# Altium PCB Power.PcbDoc
Units mm, origin at the board's own origin, x right, y up, seen from the top; angles counter-clockwise.
Board outline 47 x 53 mm, 4 copper layers (Top Copper Layer, Internal Copper Layer 1, Internal Copper Layer 2, Bottom Copper Layer), stack 1.58 mm thick; 21 components, 15 nets, 71 pads, 9 vias.
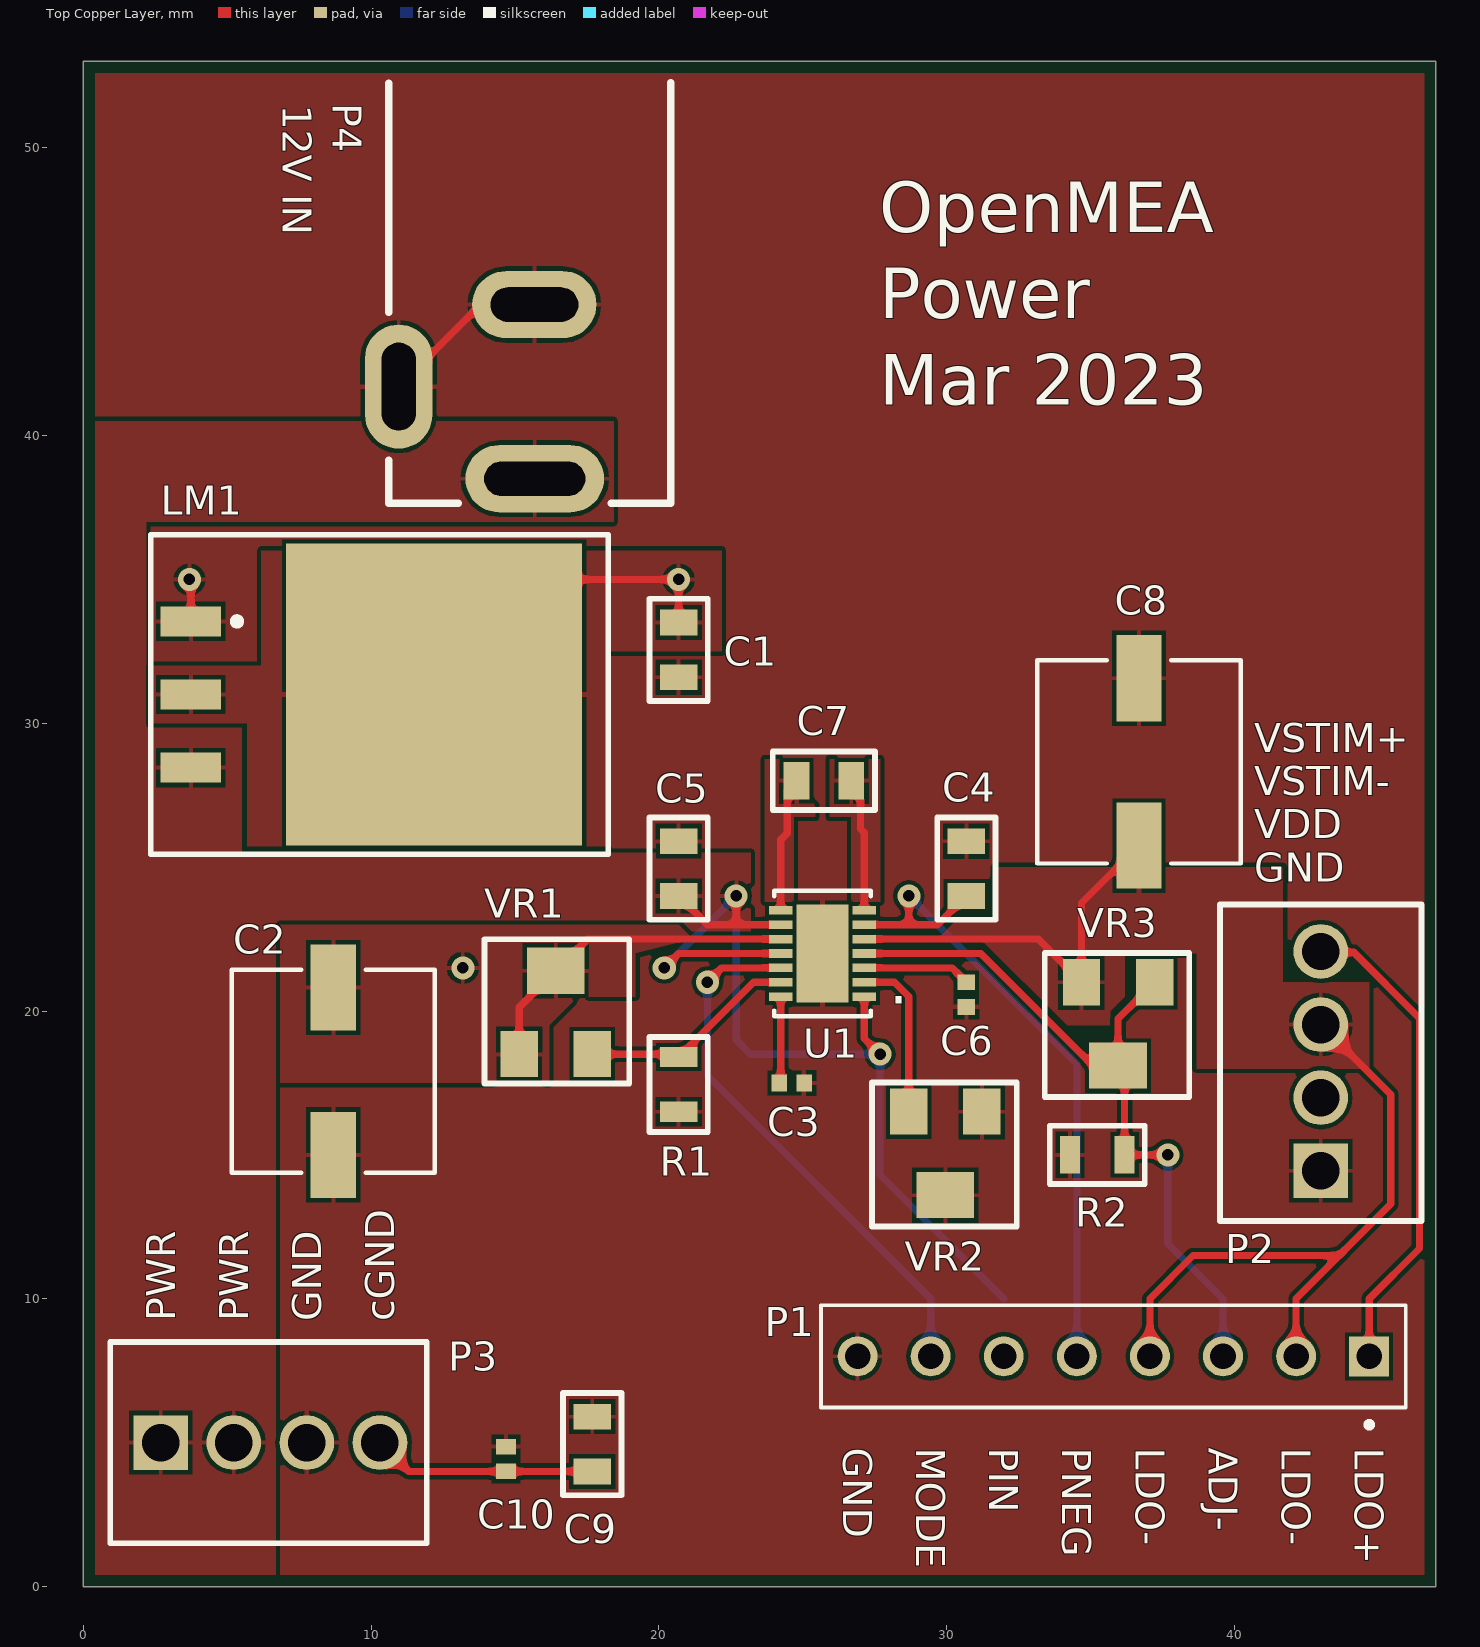
[diagram p0: Top Copper Layer view]
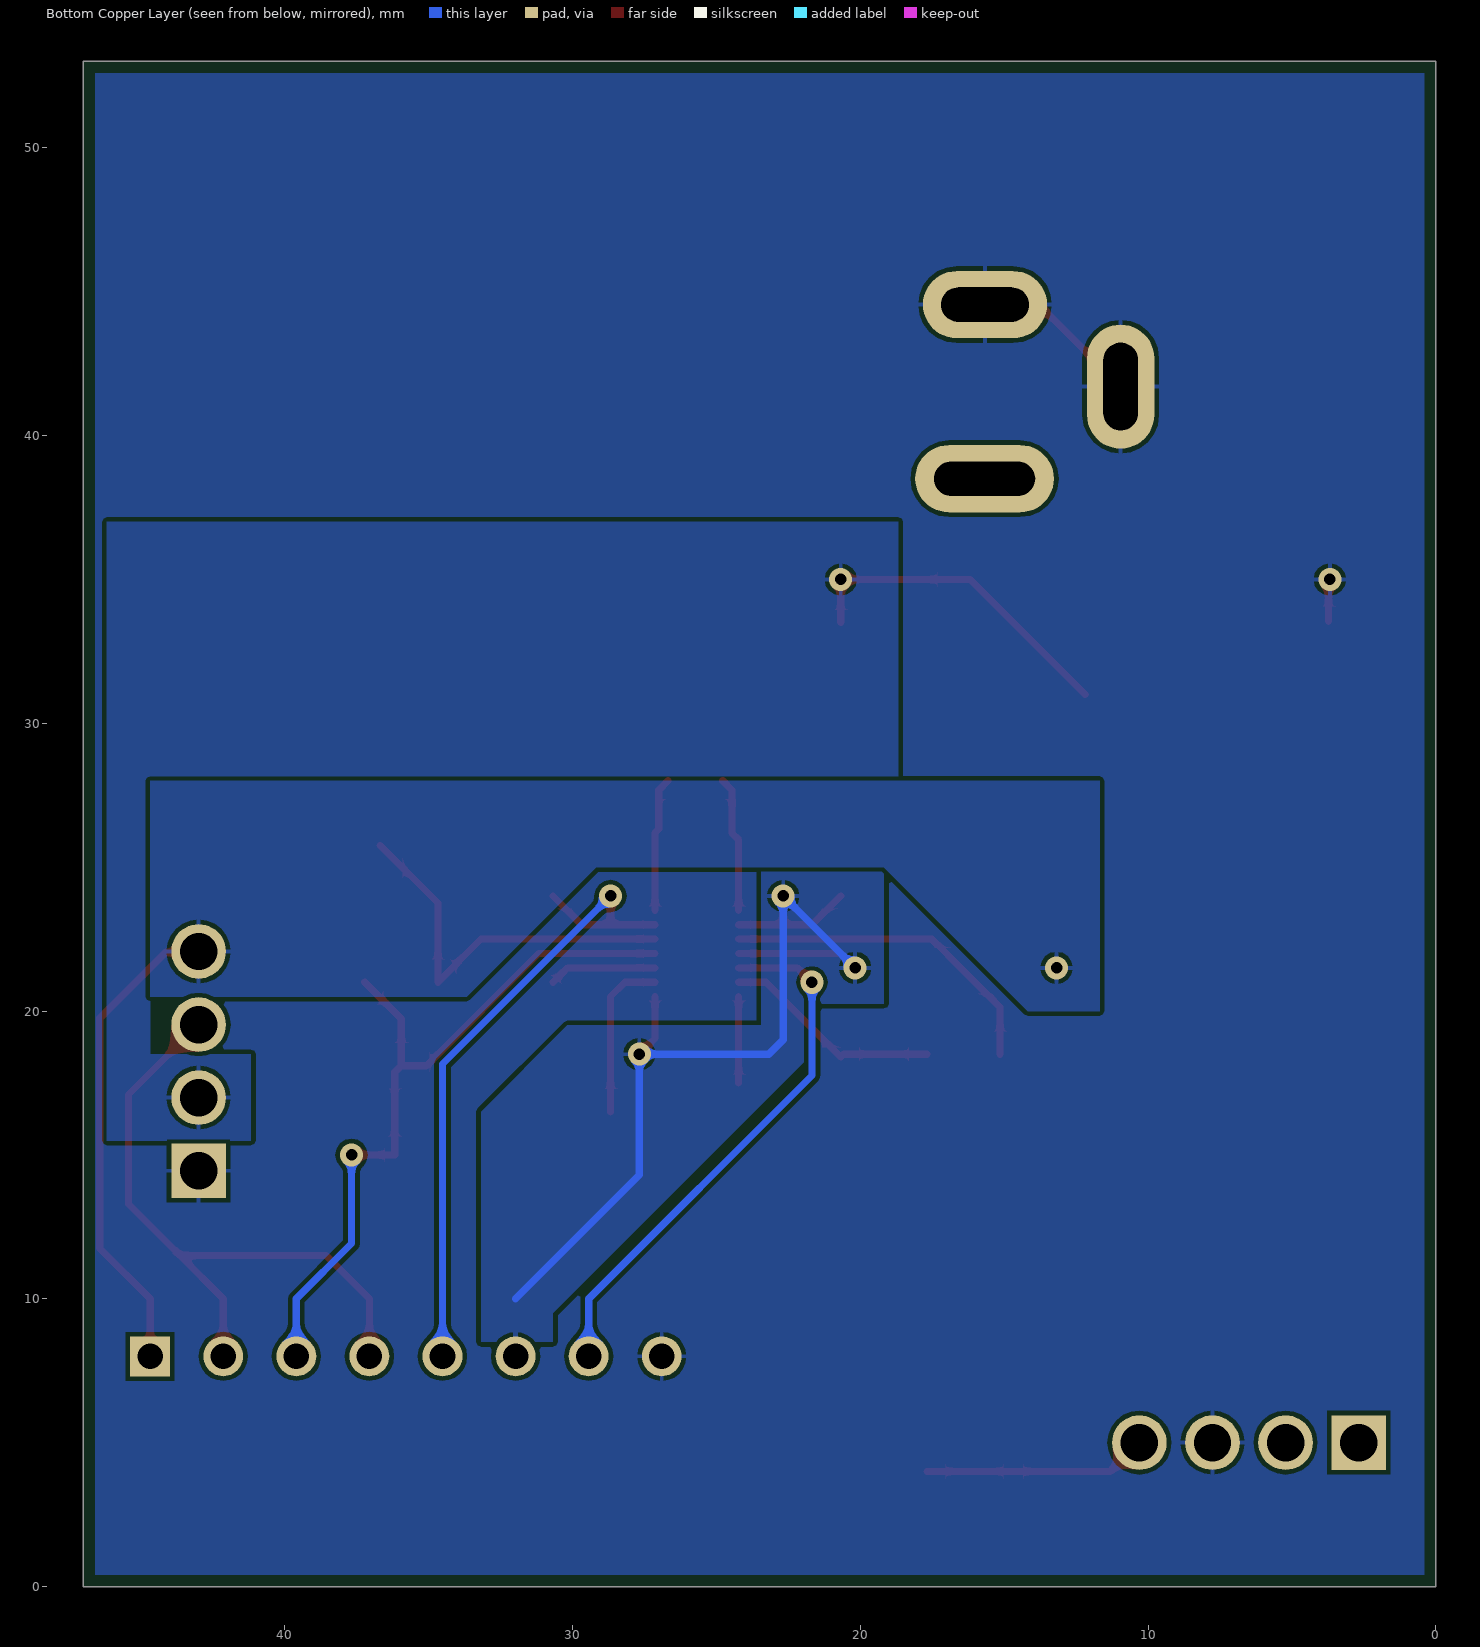
[diagram p1: Bottom Copper Layer view, seen from below]
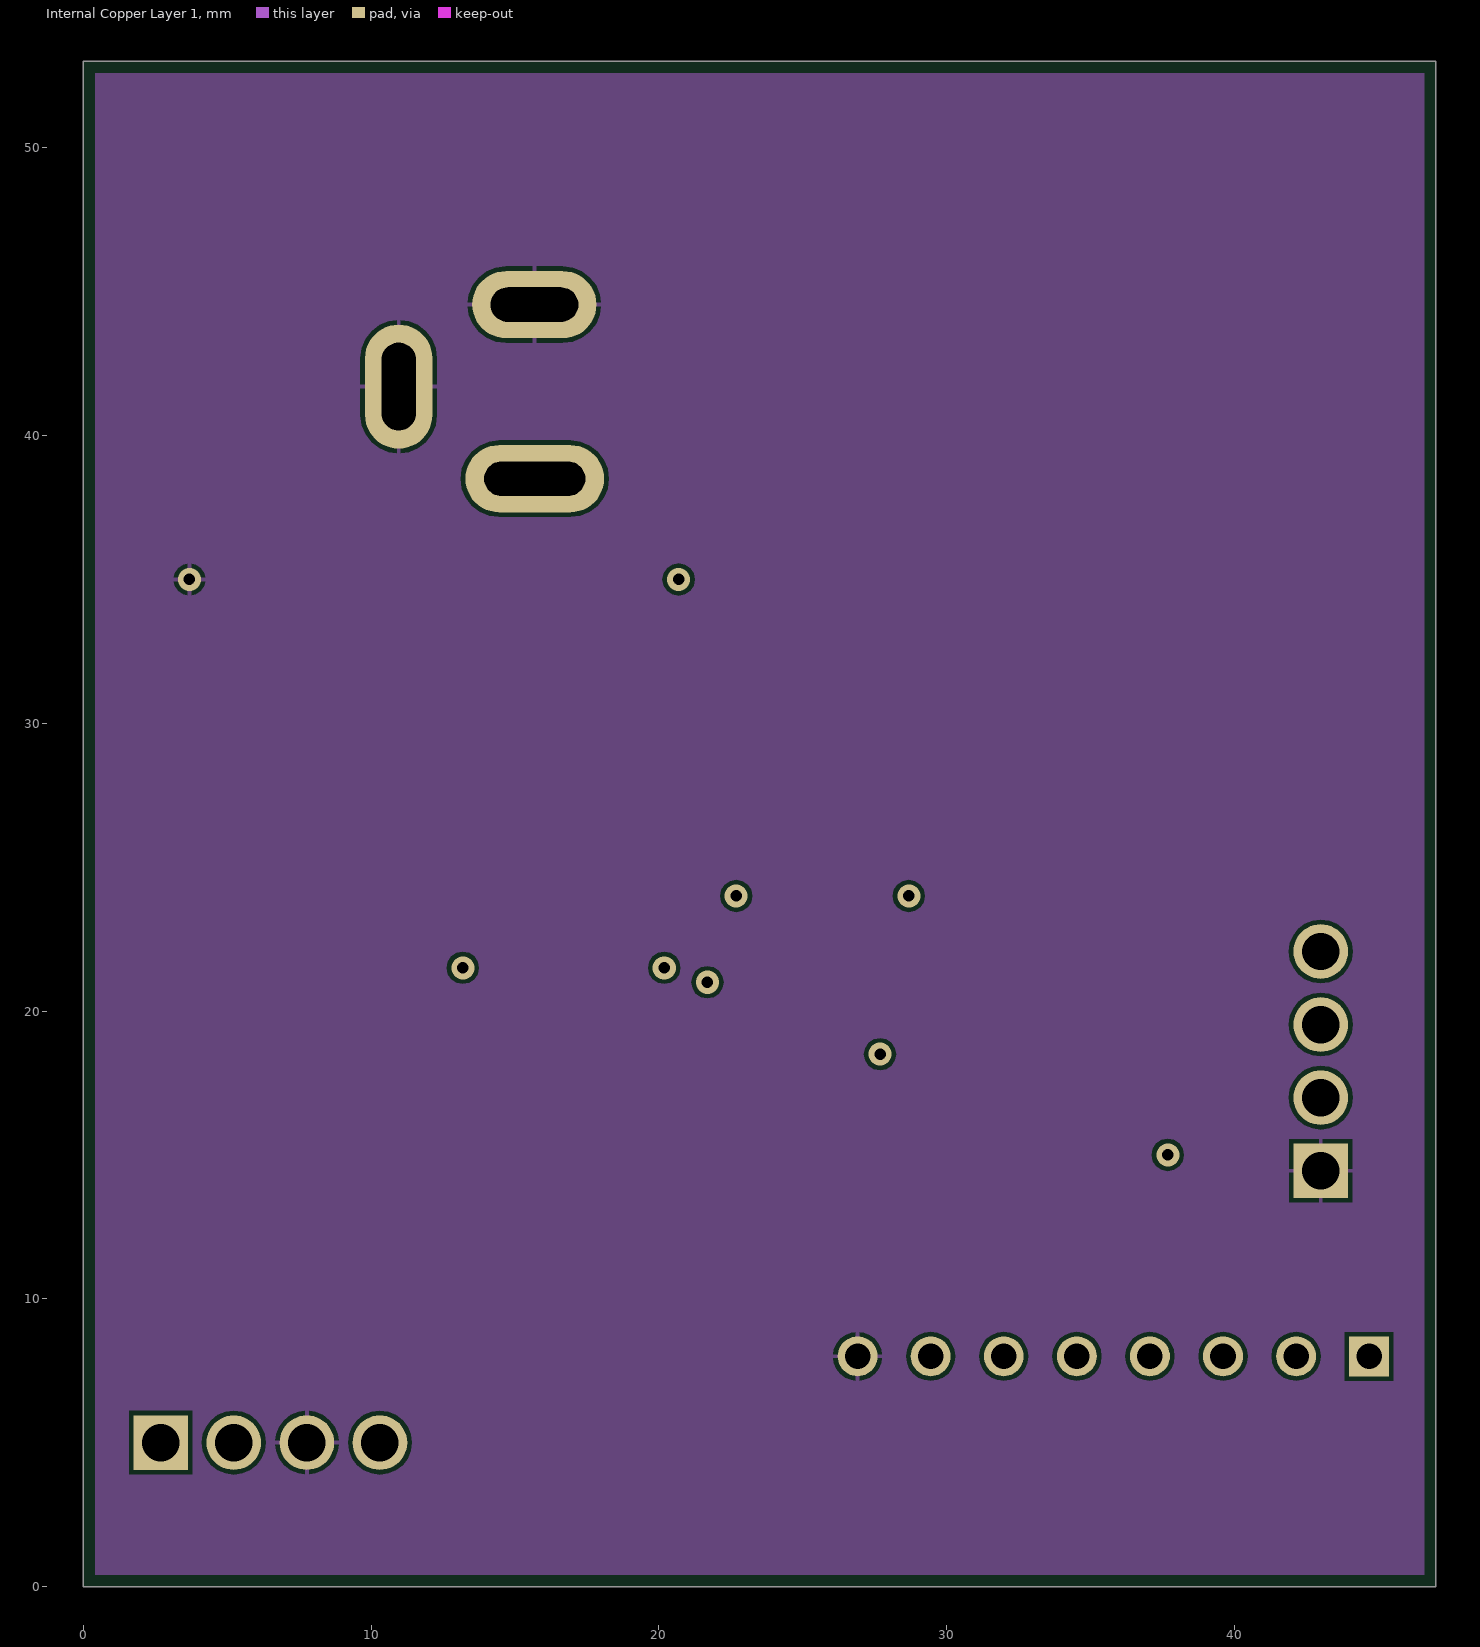
[diagram p2: Internal Copper Layer 1]
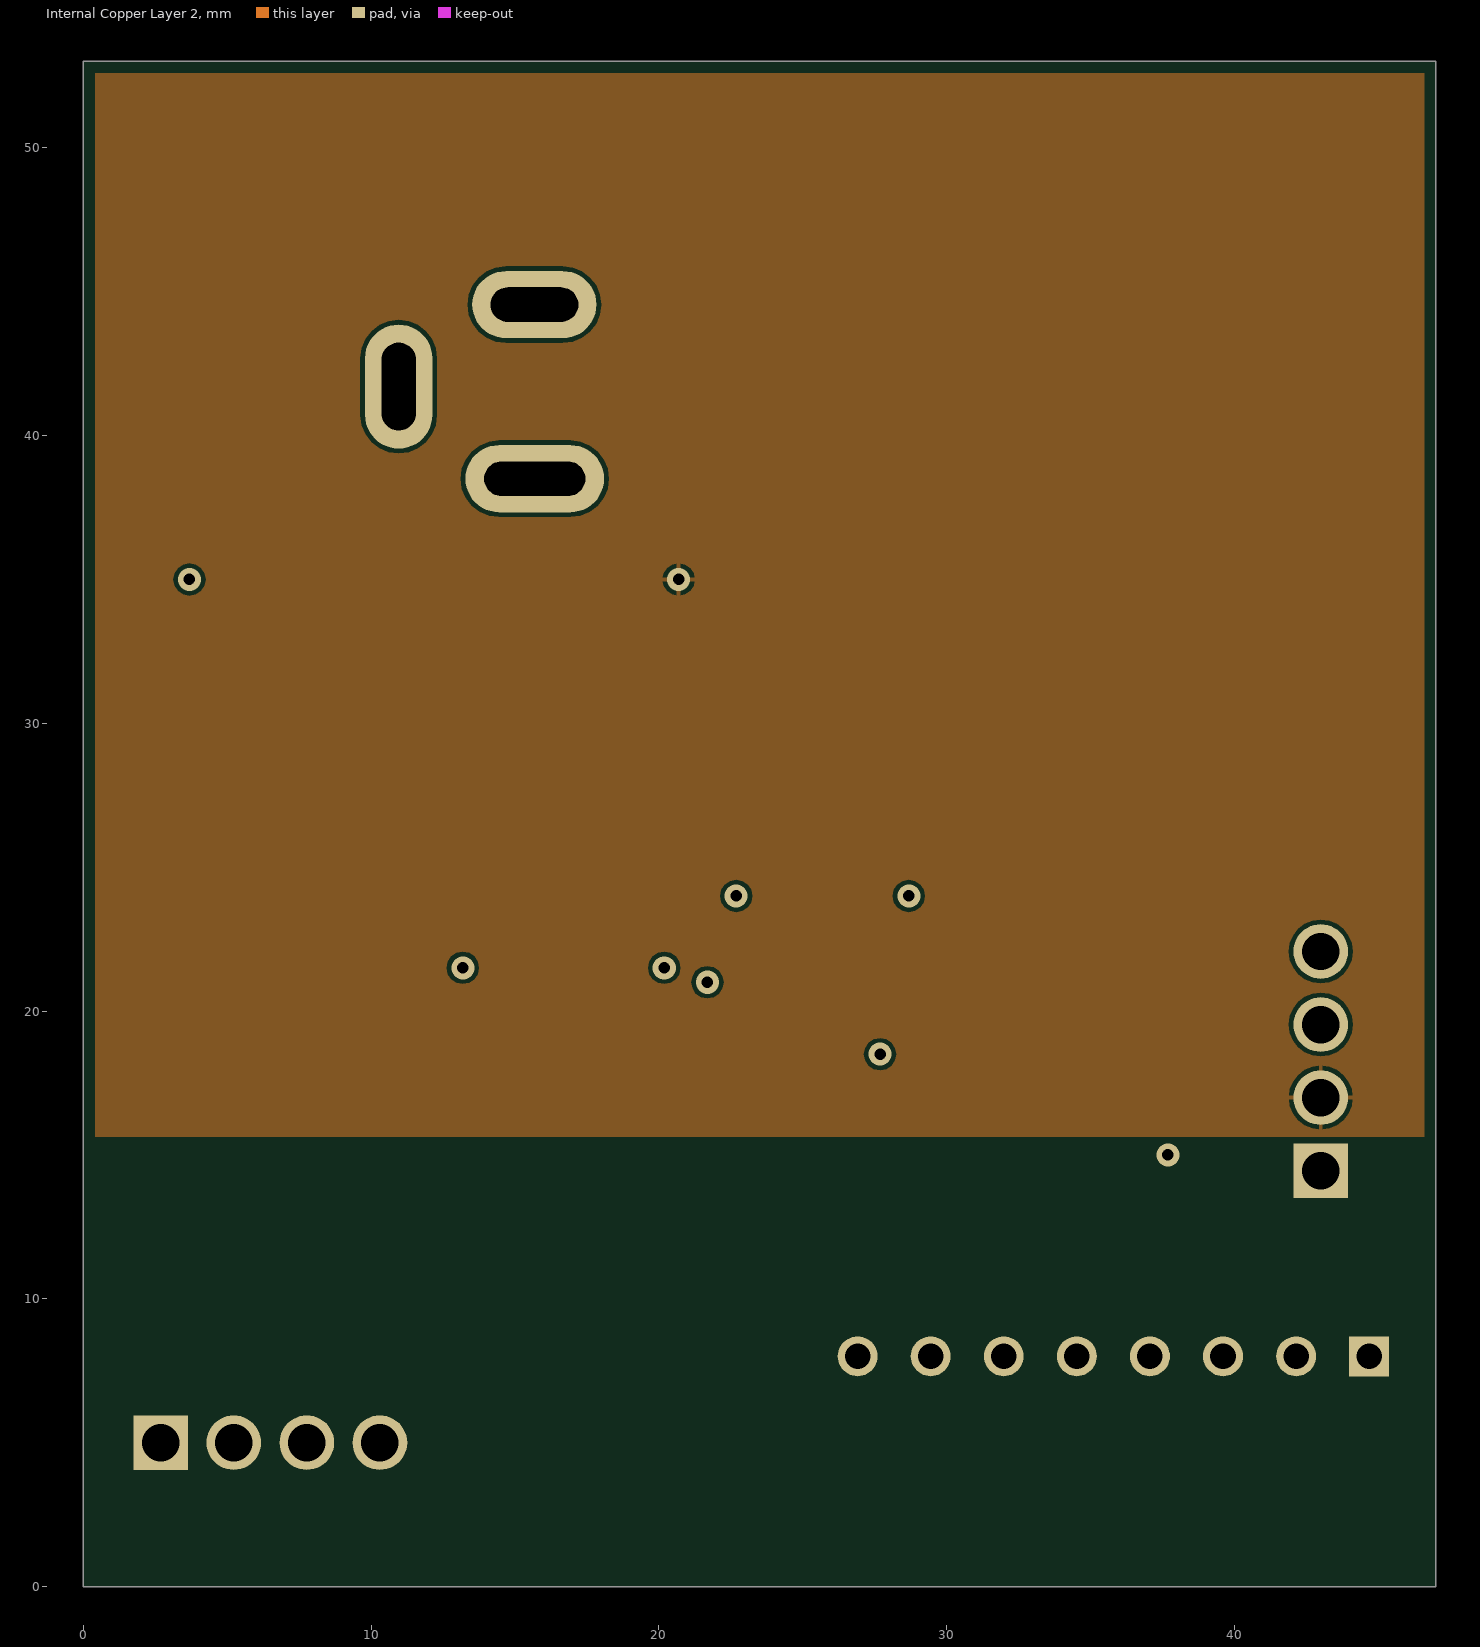
[diagram p3: Internal Copper Layer 2]

## Layer stack, top to bottom
Top Solder: solder mask 0.01, Solder Resist, Dk 3.5
Top Copper Layer: signal copper 0.035
Dielectric 1: prepreg 0.22, FR-4, Dk 4.2
Internal Copper Layer 1: signal copper 0.035
Dielectric 2: core 1, FR-4, Dk 4.2
Internal Copper Layer 2: signal copper 0.035
Dielectric 3: prepreg 0.22, FR-4, Dk 4.2
Bottom Copper Layer: signal copper 0.035
Bottom Solder: solder mask 0.01, Solder Resist, Dk 3.5

## Board outline
0,0 47,0 47,53 0,53

## Design rules (kind name [scope] priority, off if disabled: settings)
BoardOutlineClearance [All] p1: gap=0.4 ignorepadtopadclearanceinfootprint=FALSE
Clearance [All] p1: gap=0.15 ignorepadtopadclearanceinfootprint=TRUE
ComponentClearance [All] p1: gap=0.15 collisioncheckmode=3 verticalgap=0.15 showdistances=FALSE
HoleSize [All] p1: absolutevalues=TRUE maxlimit=4 minlimit=0.25 maxpercent=80.000 minpercent=20.000
HoleToHoleClearance [All] p1: gap=0.45 allowstackedmicrovias=TRUE
MinimumAnnularRing [All] p1: minimumring=0.15
MinimumSolderMaskSliver [All] p1: minsoldermaskwidth=0.15
PlaneClearance [All] p1: clearance=0.15
PlaneConnect [All] p1: planeconnectstyle=Relief reliefexpansion=0.25 reliefentries=4 reliefconductorwidth=0.15 reliefairgap=0.15
PolygonConnect [All] p1: connectstyle=Relief reliefconductorwidth=0.15 reliefentries=4 polygonreliefangle="90 Angle" airgapwidth=0.15
RoutingVias [All] p1: holewidth=0.25 width=0.55 viastyle="Through Hole" minholewidth=0.25 minwidth=0.55 maxholewidth=0.4 maxwidth=0.8
SilkToSilkClearance [All] p1: silktosilkclearance=0.2
SilkToSolderMaskClearance [IsPad] p1: minsilkscreentomaskgap=0.1 clearancetoexposedcopper=TRUE
SolderMaskExpansion [All] p1: expansion=0 istentingtop=FALSE
Width [All] p1: maxlimit=50 minlimit=0.15 preferedwidth=0.15
22 further rules are at their usual default settings.

## Classes and differential pairs
component class S1: C1 C2 C3 C4 C5 C6 C7 C8 LM1 P1 P2 R1 R2 U1 VR1 VR2 VR3
component class Power: C9 C10 P3 P4

## Components (designator, comment, footprint, x,y, rotation, side; value= is the part's Value field where it differs from the comment)
C1 "1uF" C0805 20.683,31.6 r90 top
C2 "100uF" CAP_EEFK_D 8.683,17.909 r90 top
C3 "capacitor_npol_ame" rcl_0402i_1005m_nominal 24.613,17.5 r180 top value=10nF
C4 "10uF" C0805 30.683,25.9 r270 top
C5 "10uF" C0805 20.683,25.9 r270 top
C6 "capacitor_npol_ame" rcl_0402i_1005m_nominal 30.683,20.57 r90 top value=10nF
C7 "1uF" C0805 24.783,28 r0 top
C8 "100uF" CAP_EEFK_D 36.683,28.659 r270 top
C9 "10uF" C0805 17.683,4 r90 top
C10 "capacitor_npol_ame" rcl_0402i_1005m_most 14.683,4.43 r90 top value=100nF
LM1 "3.3V" LM1085 3.733,33.54 r270 top
P1 "Header 8" TE_5-535541-6 35.793,8 r180 top
P2 "Header 4" OSTVN04A150 43,14.45 r90 top
P3 "Header 4" OSTVN04A150 2.683,5 r0 top
P4 "PWR2.1MM" POWER2.1MM 15.683,38.5 r90 top
R1 "100KR" R0805 20.683,16.5 r90 top
R2 "100KR" R0805 36.183,15 r180 top
U1 "Part Number: ltc3260ide" DFN-14_DE 25.683,22 r180 top value=Value
VR1 "Tunable 1M Max" res_var_5turn 15.143,18.5 r0 top
VR2 "Tunable 1M Max" res_var_5turn 31.223,16.5 r180 top
VR3 "Tunable 1M Max" res_var_5turn 37.223,21 r180 top

## Footprints (in the part's own frame and the unit in brackets; to place one, negate y for a bottom-side part, rotate by r counter-clockwise, add the part's x,y. Pads: shape width x height; smd on the part's side, far side on the other; paste and mask are expansions set on the pad)
C0805 [mm]
  rect 0.9x1.3 smd: 1(0,0) 2(1.9,0)
  silkscreen extent -0.83,-1.02 2.73,1.02, body extent -0.05,-0.6 1.95,0.6, height 1.46
CAP_EEFK_D [mil] "CAP ALUM 100UF 20% 35V SMD"
  rect 118x62 smd paste+0 mask+0: 1(-114.5,0) 2(114.5,0)
  silkscreen extent -139,-139 139,139, body extent -154,-134 154,134, height 242
DFN-14_DE [mm]
  rect 0.805x0.3 smd: 1(-1.452,1.5) 2(-1.452,1) 3(-1.452,0.5) 4(-1.452,0) 5(-1.452,-0.5) 6(-1.452,-1) 7(-1.452,-1.5) 8(1.452,-1.5) 9(1.452,-1) 10(1.452,-0.5) 11(1.452,0) 12(1.452,0.5) 13(1.452,1) 14(1.452,1.5)
  rect 1.8x3.4 smd paste-1.687: 15(0,0)
  silkscreen extent -1.68,-2.18 1.68,2.18, body extent 0,0 0.25,0.25, height 0.25
LM1085 [mm] "D2-PAK; 3 Leads; Body 14.4 (inc. leads) x 10.4 mm (LxW max)"
  rect 1.05x2.1 smd: 1(0,0) 2(2.54,0) 3(5.08,0)
  rect 10.5x10.3 smd: 2(2.54,8.45)
  silkscreen extent -3.01,-1.4 8.09,14.5, body extent -2.54,-0.87 7.62,14.37, height 4.54
OSTVN04A150 [mm] "4 Position Wire to Board Terminal Block Horizontal with Board 0.100\" (2.54mm) Through Hole"
  rect 1.9x1.9 hole 1.3: 1(0,0)
  round 1.9 hole 1.3: 2(2.54,0) 3(5.08,0) 4(7.62,0)
  silkscreen extent -1.75,-3.5 9.25,3.5, body extent -1.47,-3.25 9.09,3.25, height 8.65
POWER2.1MM [mil]
  oval 92x190 hole 47 slot 138 at 90 deg: 1(0,0)
  oval 170x92 hole 47 slot 120 at 0 deg: 2(126,186.17)
  oval 92x170 hole 47 slot 120 at 90 deg: 3(238.19,0.55)
  silkscreen extent -33,-186 542,200, body extent -25,-178 542,192, height 434
R0805 [mm]
  rect 0.7x1.3 smd: 1(0,0) 2(1.9,0)
  silkscreen extent -0.7,-1.02 2.6,1.02, body extent -0.05,-0.6 1.95,0.6, height 0.71
rcl_0402i_1005m_most [mm] "Chip RCL, 0402 Imperial, 1005 Metric, 2-Leads, Body 1.00x0.5mm, IPC Most Land (Low Density)"
  rect 0.54x0.7 smd: 1(-0.43,0) 2(0.43,0)
  body extent -0.5,-0.25 0.5,0.25, height 0.5
rcl_0402i_1005m_nominal [mm] "Chip RCL, 0402 Imperial, 1005 Metric, 2-Leads, Body 1.00x0.5mm, IPC Nominal Medium Density"
  rect 0.54x0.6 smd: 1(-0.43,0) 2(0.43,0)
  body extent -0.5,-0.25 0.5,0.25, height 0.5
res_var_5turn [mm]
  rect 1.3x1.6 smd: 1(0,0) 3(2.54,0)
  rect 2x1.6 smd: 2(1.27,2.9)
  silkscreen extent -1.21,-1.02 3.82,3.99, body extent -1.1,-0.52 3.7,3.38, height 5.31
TE_5-535541-6 [mil] "CONN RCPT 8POS 0.1 GOLD PCB"
  rect 54.65x54.65 hole 35: 1(-349.98,0)
  round 54.65 hole 35: 2(-250,0) 3(-150,0) 4(-50,0) 5(50,0) 6(150,0) 7(250,0) 8(350.02,0)
  silkscreen extent -400,-70 400,98, body extent -400,-70 400,70, height 275

## Part data
C1 C7: library part C2012X5R1E105K125AA, "CAP 1UF", Case/Package=0805, Case Code (Metric)=2012, Dielectric=X5R, Dielectric Material=Ceramic, Manufacturer=TDK, Max Operating Temperature=85°C, Min Operating Temperature=-55°C, Package Quantity=2000, Supplier Part Number 1=445-1419-1-ND, Tolerance=10%, Voltage=25V, Capacitance=1uF, Case Code (Imperial)=0805, ComponentLink1Description=https://datasheet.ciiva.com/11787/0900766b80c1bb00-11787608.pdf, ComponentLink1URL=https://datasheet.ciiva.com/11787/0900766b80c1bb00-11787608.pdf, ComponentLink2Description=https://datasheet.ciiva.com/24218/c2012x5r1e105k125aa-264807-24218920.pdf, ComponentLink2URL=https://datasheet.ciiva.com/24218/c2012x5r1e105k125aa-264807-24218920.pdf, ComponentLink3Description=https://datasheet.ciiva.com/16449/e412-c-16449595.pdf, ComponentLink3URL=https://datasheet.ciiva.com/16449/e412-c-16449595.pdf, ComponentLink4Description=https://datasheet.ciiva.com/28602/1744655-28602171.pdf, ComponentLink4URL=https://datasheet.ciiva.com/28602/1744655-28602171.pdf, ComponentLink5Description=https://datasheet.ciiva.com/15192/getdatasheetpartid-726707-15192140.pdf, ComponentLink5URL=https://datasheet.ciiva.com/15192/getdatasheetpartid-726707-15192140.pdf, Composition=Ceramic, Depth=1.25mm, Height=1.25mm, Lead Free="Lead Free", Length=2mm, Manufacturer Part Number=C2012X5R1E105K125AA, Mount="Surface Mount", Number of Pins=2, Packaging="Tape and Reel", Pricing 1="1=0.21, 10=0.146, 100=0.0688, 500=0.0482, 1000=0.0399 (USD)", Radiation Hardening=No, REACH SVHC="No SVHC", Stock 1=517560, Supplier 1=Digi-Key, Supplier Link 1=https://www.digikey.ca/products/en?keywords=445-1419-1-ND, Termination=SMD/SMT, Thickness=0.057inch, Voltage Rating=25V, Voltage Rating (DC)=25V, Weight=0.000194oz, Width=0.049inch
C2 C8: library part C2012X5R1E106K085AC, "CAP ALUM 100UF 20% 35V SMD", Dielectric="Electrolytic Capacitor", Dielectric Material=N/A, ESR (Equivalent Series Resistance)="260mOhm @ 100kHz", Manufacturer="Panasonic Electronic Components", Manufacturer Part Number=EEE-FT1V101AP, Max Operating Temperature=105°C, Min Operating Temperature=-55°C, Package Type="Radial Can, SMT", Ripple Current @ High Frequency="300mA @ 100kHz", Ripple Current @ Low Frequency="195mA @ 120Hz", Supplier Part Number 1=PCE5016CT-ND, Tolerance=20%, Voltage Rating=35V, Capacitance=100uF, ComponentLink1Description=Datasheet, ComponentLink1URL=https://industrial.panasonic.com/cdbs/www-data/pdf/RDE0000/ABA0000C1240.pdf, ComponentLink2Description=NamingScheme, ComponentLink2URL=https://industrial.panasonic.com/cdbs/www-data/pdf/RDE0000/DME0000COL90.pdf, Diam.=6.3mm, Height=6.1mm, Length=6.6mm, Mount="Surface Mount", Packaging="Cut Tape (CT)", Polarization=Polarized, Pricing 1="1=0.86;  10=0.605;  100=0.3984  (CAD)", Stock 1=336,289, Supplier 1=Digi-Key, Supplier Link 1=https://www.digikey.ca/product-detail/en/panasonic-electronic-components/EEE-FT1V101AP/PCE5016CT-ND/2652071, Termination=SMD/SMT, Voltage Rating (DC)=35V, Width=6.6mm
C3 C6: "Capacitor Non-polarized American Symbol", Case Code=0402, Manufacturer="Murata Electronics North America", Manufacturer Part Number=GRM155R71E103KA01D, Supplier Part Number 1=490-1312-1-ND, Tolerance=10%, Voltage Rating=25V, ComponentLink1Description="Reference Sheet", ComponentLink1URL=https://search.murata.co.jp/Ceramy/image/img/A01X/G101/ENG/GRM155R71E103KA01-01.pdf, Pricing 1="1=0.14;  10=0.042;  100=0.0188;  500=0.01346;  1000=0.01058;  3500=0.00961;  5000=0.00884  (CAD)", Stock 1=4961, Supplier 1=Digikey, Supplier Link 1=https://www.digikey.ca/products/en?keywords=490-1312-1-ND
C4 C5 C9: library part C2012X5R1E106K085AC, "CAP 10UF", Case/Package=0805, Case Code (Metric)=2012, Dielectric=X5R, Dielectric Material=Ceramic, Manufacturer="Samsung Electro-Mechanics", Manufacturer Part Number=CL21A106KAYNNNE, Max Operating Temperature=85°C, Min Operating Temperature=-55°C, Supplier Part Number 1=1276-2891-1-ND, Tolerance=10%, Voltage Rating=25V, Capacitance=10uF, Case Code (Imperial)=0805, ComponentLink1Description=Specifications, ComponentLink1URL=http://www.samsungsem.com/kr/support/product-search/mlcc/__icsFiles/afieldfile/2018/06/20/CL21A106KAYNNNE.pdf, ComponentLink2Description=Characteristics, ComponentLink2URL=https://media.digikey.com/pdf/Data%20Sheets/Samsung%20PDFs/CL21A106KAYNNNE_Char.pdf, ComponentLink3Description=Datasheet, ComponentLink3URL=https://media.digikey.com/pdf/Data%20Sheets/Samsung%20PDFs/CL_Series_MLCC_ds.pdf, Lead Free="Lead Free", Length=0.079inch, Mount="Surface Mount", Packaging="Tape and Reel", Pricing 1="1=0.39;  10=0.264;  100=0.13340;  500=0.09128;  1000=0.08075  (CAD)", Stock 1=843, Supplier 1=Digi-Key, Supplier Link 1=https://www.digikey.ca/product-detail/en/samsung-electro-mechanics/CL21A106KAYNNNE/1276-2891-1-ND/3890977, Termination=SMD/SMT, Thickness=1.25mm, Voltage Rating (DC)=25V, Width=0.049inch
C10: "Capacitor Non-polarized American Symbol", Manufacturer=Yageo, Manufacturer Part Number=CC0402KRX7R8BB104, Package=0402, Supplier Part Number 1=311-2077-1-ND, Voltage Rating=25V, ComponentLink1Description=Datasheet, ComponentLink1URL=http://www.yageo.com/documents/recent/UPY-GPHC_X7R_6.3V-to-50V_18.pdf, Priging 1="1 	0.15000 	$0.15 (CAD)", Stock 1=143,749, Supplier 1=Digikey, Supplier Description 1="CAP CER 0.1UF 25V X7R 0402", Supplier Link 1=https://www.digikey.ca/product-detail/en/yageo/CC0402KRX7R8BB104/311-2077-1-ND/5698948
LM1: library part LM1085, "LM1085ISX-3.3/NOPB", Case/Package=TO-263, Dropout Voltage=1.3V, Manufacturer="TI National Semiconductor", Max Input Voltage=27V, Max Operating Temperature=125°C, Max Output Current=3A, Min Current Limit=3.2A, Min Input Voltage=2.6V, Min Operating Temperature=-40°C, Package Quantity=500, Quiescent Current=10mA, Supplier Part Number 1=LM1085ISX-3.3/NOPBCT-ND, ComponentLink1Description=https://datasheet.ciiva.com/15111/getdatasheetpartid-55637-15111252.pdf, ComponentLink1URL=https://datasheet.ciiva.com/15111/getdatasheetpartid-55637-15111252.pdf, ComponentLink2Description=https://datasheet.ciiva.com/26167/lm1085-26167653.pdf, ComponentLink2URL=https://datasheet.ciiva.com/26167/lm1085-26167653.pdf, ComponentLink3Description=https://datasheet.ciiva.com/3223/lm1085-3223480.pdf, ComponentLink3URL=https://datasheet.ciiva.com/3223/lm1085-3223480.pdf, ComponentLink4Description=https://datasheet.ciiva.com/6582/lm1085-6582715.pdf, ComponentLink4URL=https://datasheet.ciiva.com/6582/lm1085-6582715.pdf, ComponentLink5Description=https://datasheet.ciiva.com/34302/1278979-34302139.pdf, ComponentLink5URL=https://datasheet.ciiva.com/34302/1278979-34302139.pdf, ComponentLink6Description=https://datasheet.ciiva.com/6582/lm1085-6582716.pdf, ComponentLink6URL=https://datasheet.ciiva.com/6582/lm1085-6582716.pdf, ComponentLink7Description=https://datasheet.ciiva.com/6582/lm1085-6582718.pdf, ComponentLink7URL=https://datasheet.ciiva.com/6582/lm1085-6582718.pdf, ComponentLink8Description=https://datasheet.ciiva.com/41457/001013599-da-01-en-ic-reg-l-lm1085isx-3-3-nopb-to-263-3-tid-41457356.pdf, ComponentLink8URL=https://datasheet.ciiva.com/41457/001013599-da-01-en-ic-reg-l-lm1085isx-3-3-nopb-to-263-3-tid-41457356.pdf, Contact Plating=Tin,Matte, Height=4.57mm, Lead Free="Contains Lead", Length=10.16mm, Manufacturer Part Number=LM1085ISX-3.3/NOPB, Mount="Surface Mount", Nominal Output Voltage=3.3V, Number of Outputs=1, Number of Pins=3, Number of Regulators=1, Output Current=3A, Output Voltage=3.3V, Packaging="Tape and Reel", Polarity=Positive, Pricing 1="1=2.03, 10=1.826, 100=1.4677 (USD)", Radiation Hardening=No, REACH SVHC="No SVHC", Stock 1=18956, Supplier 1=Digi-Key, Supplier Link 1=https://www.digikey.ca/products/en?keywords=LM1085ISX-3.3%2FNOPBCT-ND, Width=8.64mm
P1: "Header, 8-Pin", Manufacturer="TE Connectivity AMP Connectors", Manufacturer Part Number=5-535541-6, Supplier Part Number 1=A32921-ND, ComponentLink1Description=Datasheet, ComponentLink1URL=https://www.te.com/commerce/DocumentDelivery/DDEController?Action=srchrtrv&DocNm=535541&DocType=Customer+Drawing&DocLang=English, Manufacturer Link=https://www.te.com/usa-en/product-5-535541-6.html, Price1="1  2.79000  $2.79  28  2.37000  $66.36  112  2.16411  $242.38  504  1.80345  $908.94  1,008  1.54581  $1,558.18  5,012  1.37062  $6,869.56  10,024  1.33971  (CAD)", Stock1=2,929, Supplier 1=Digikey, Supplier Link 1=https://www.digikey.ca/product-detail/en/te-connectivity-amp-connectors/5-535541-6/A32921-ND/1092992
P2 P3: "Header, 4-Pin", Manufacturer="On Shore Technology Inc.", Manufacturer Part Number=OSTVN04A150, Supplier Part Number 1=ED10563-ND, ComponentLink1Description=Datasheet, ComponentLink1URL=http://www.on-shore.com/wp-content/uploads/OSTVNXXA150.pdf, Detailed Description="4 Position Wire to Board Terminal Block Horizontal with Board 0.100\" (2.54mm) Through Hole", LatestRevisionDate=17-Jul-2002, LatestRevisionNote="Re-released for DXP Platform.", Manufacturer Link=https://www.on-shore.com/part/ostvnxxa150-terminal-block-one-piece-rising-clamp/, Pitch (imperial)=100mil, Pricing 1="1  1.38000  $1.38  10  0.96900  $9.69  25  0.90400  $22.60  50  0.82040  $41.02  100  0.81680  $81.68  250  0.68972  $172.43  500  0.65340  $326.70  1,000  0.58080  $580.80  5,000  0.47190  $2,359.50 (CAD)", Publisher="Altium Limited", Stock 1=8,195, Supplier 1=Digikey, Supplier Link 1=https://www.digikey.com/product-detail/en/on-shore-technology-inc/OSTVN04A150/ED10563-ND/1588864
P4: "PJ-002AH", Colour=Black, Current Rating=5A, Flammability Rating="UL94 V-0", Insulation Resistance=50MR, Manufacturer=CUI, Max Operating Temperature=85°C, Min Operating Temperature=-25°C, Package Quantity=500, Supplier Part Number 1=CP-002AH-ND, Voltage Rating=24V, ComponentLink1Description=http://www.cui.com/Product/Resource/FuturePDF/PJ-002AH.pdf, ComponentLink1URL=http://www.cui.com/Product/Resource/FuturePDF/PJ-002AH.pdf, ComponentLink2Description=http://www.cui.com/product/resource/digikeypdf/pj-002ah.pdf, ComponentLink2URL=http://www.cui.com/product/resource/digikeypdf/pj-002ah.pdf, ComponentLink3Description=http://www.mouser.com/ds/2/670/pj-002ah-516007.pdf, ComponentLink3URL=http://www.mouser.com/ds/2/670/pj-002ah-516007.pdf, Connector Type=Jack, Contact Gender=Male, Contact Material="Copper,Copper Alloy", Contact Plating=Nickel, Diameter=2.1mm, Gender=Male, Housing Colour=Black, Housing Material=Thermoplastic, Lead Free="Lead Free", Manufacturer Part Number=PJ-002AH, Mount="Through Hole", Number of Conductors=2, Orientation=Horizontal, Packaging=Bulk, Pricing 1="1=0.74, 10=0.696, 25=0.6264, 50=0.5568, 100=0.5336, 250=0.4872, 500=0.464, 1000=0.3828, 2500=0.348 (USD)", Shielding=Unshielded, Stock 1=95768, Supplier 1=Digi-Key, Supplier Link 1=https://www.digikey.ca/products/en?keywords=CP-002AH-ND, Termination="Through Hole"
R1 R2: library part RES100, "CRCW0805100KFKEA", Case/Package=0805, Case Code (Metric)=2012, Manufacturer="Vishay Dale", Max Operating Temperature=155°C, Max Power Dissipation=125mW, Min Operating Temperature=-55°C, Package Quantity=1, Temperature Coefficient=100ppm/°C, Tolerance=1%, Voltage Rating=200V, Case Code (Imperial)=0805, ComponentLink1Description=Datasheet, ComponentLink1URL=http://www.vishay.com/docs/20035/dcrcwe3.pdf, Composition="Thick Film", Lead Free="Lead Free", Length=2mm, Manufacturer Part Number=CRCW0805100KFKEA, Military Standard=Not, Number of Terminations=2, Packaging="Cut Tape (CT)", Power Rating=125mW, Pricing 1="Free with 7PCB", Pricing 2="1=0.15; (CAD)", REACH SVHC=Unknown, Resistance=100KR, Stock 1=286355, Stock2=286,105, Supplier 1=7PCB/Bittele, Supplier2=Digikey, Supplier Link 1=https://parts.7pcb.com/, SupplierLink2=https://www.digikey.ca/product-detail/en/vishay-dale/CRCW0805100KFKEA/541-100KCCT-ND/1181013, Supplier Part Number 1=CRCW0805100KFKEA, Supplier Part Number 2=541-100KCCT-ND, Termination=SMD/SMT, Weight=4mg, Width=1.25mm
U1: library part LTC3260IDE, "IC REG CHARGE PUMP INV 14DFN", Current - Output=100mA, Frequency - Switching="50kHz ~ 500kHz", Manufacturer="Linear Technology/Analog Devices", Manufacturer_Part_Number=ltc3260ide, Manufacturer Part Number=LTC3260EDE#TRPBF, Operating Temperature="-40°C ~ 125°C (TJ)", Package / Case="14-WFDFN Exposed Pad", Supplier Device Package="14-DFN (4x3)", Supplier Part Number 1=LTC3260EDE#TRPBFCT-ND, Voltage - Input (Max)=32V, Voltage - Input (Min)=4.5V, ComponentLink1Description=Datasheet, ComponentLink1URL=http://www.linear.com/docs/41410, Copyright="Copyright (C) 2018 Accelerated Designs. All rights reserved", Detailed Description="Charge Pump Switching Regulator IC Positive and Negative (Dual Rail) Fixed -Vin 2 Output 100mA 14-WFDFN Exposed Pad", Mounting Type="Surface Mount", Output Configuration="Positive and Negative (Dual Rail)", Packaging="Cut Tape (CT)", Pricing1="Price Break  Unit Price  Extended Price  1  13.01000  $13.01  25  9.55440  $238.86  100  7.14360  $714.36  250  6.78644  $1,696.61  500  6.63338  $3,316.69 (CAD)", RefDes=RefDes, Stock1=4,881, Supplier 1=Digikey, Supplier Link 1=https://www.digikey.ca/product-detail/en/linear-technology-analog-devices/LTC3260EDE-TRPBF/LTC3260EDE-TRPBFCT-ND/8433300, Synchronous Rectifier=No, Type=DEV, Vendor="Linear Technology"
VR1 VR2 VR3: library part RES_VAR_5TURN, "TRIMMER 1M OHM 0.25W J LEAD TOP", Manufacturer="Nidec Copal", Manufacturer Part Number=SM-42TW105, Max Operating Temperature=150°C, Max Power Dissipation=250mW, Min Operating Temperature=-65°C, Package Quantity=1, Resistance=1MOhms, Supplier Part Number 1=SM-42TW105CT-ND, Temperature Coefficient=100ppm/°C, Tolerance=10%, ComponentLink1Description=https://www.nidec-copal-electronics.com/e/catalog/trimmer/sm-42&sm-43.pdf, Composition=Cermet, Height=0.201inch, Length=0.189inch, Mount="Surface Mount", Number of Turns=11, Packaging="Cut Tape", Pricing 1="1=5.26;  10=4.604;  25=4.1112 ... (CAD)", Radiation Hardening=No, Stock 1=347, Supplier 1=Digi-Key, Supplier Link 1=https://www.digikey.ca/product-detail/en/nidec-copal-electronics/SM-42TW105/SM-42TW105CT-ND/1632404, Width=0.138inch

## Via types
v1: diameter 0.8, hole 0.4, Top Copper Layer to Bottom Copper Layer, tented both sides, 9 vias

## Nets (pads, with @x,y where several pads share a name; then routed paths per layer and width w, separated by ;. In a path a pad name is that pad's centre, name@x,y a point inside that pad or via, vN(x,y) a via of type N, cw(c..) or ccw(c..) an arc to the next point about the centre after c; other vN are vias at no path point)
ADJ+: R1.2 U1.13 VR1.3 | length 7.7
  Top Copper Layer w0.25: VR1.3 20.583,18.5 R1.2 23.283,21 U1.13
ADJ-: P1.3 R2.1 U1.4 VR3.1 VR3.2 | length 26.3
  Top Copper Layer w0.25: U1.4 31.183,22 35.083,18.1 VR3.2 ; VR3.1 35.953,19.73 VR3.2 ; v1(37.683,15) R2.1 36.183,17.87 VR3.2
  Bottom Copper Layer w0.25: v1(37.683,15) 37.683,11.92 39.603,10 P1.3
BYP+: C3.2 U1.14 | length 3
  Top Copper Layer w0.25: C3.2@24.231,17.5 U1.14
BYP-: C6.2 U1.3 | length 3.8
  Top Copper Layer w0.25: U1.3 30.183,21.5 C6.2
EPAD: C1.1 C2.1 C3.1 C4.1 C5.1 C6.1 C8.1 C9.2 C10.2 LM1.1 P1.8 P2.1 P3.3 P4.2 P4.3 R1.1 R2.2 U1.15 VR2.1 VR2.2 | length 7.4
  Top Copper Layer w0.25: v1(3.683,35) 3.733,34.95 LM1.1 ; P4.2 13.804,44.55 P4.3
LDO+: C2.2 P1.1 P2.4 U1.10 VR1.1 VR1.2 | length 28.6
  Top Copper Layer w0.25: VR1.1 15.143,20.13 VR1.2 17.513,22.5 U1.10 ; P2.4@43,22.04 44.143,22.04 46.433,19.75 46.433,11.75 44.683,10 P1.1
  other v1: 13.183,21.5
LDO-: C8.2 P1.2 P1.4 P2.3 U1.5 VR3.3 | length 36.8
  Top Copper Layer w0.25: U1.5 33.183,22.5 VR3.3 34.683,23.75 C8.2 ; P1.4 37.063,10 38.563,11.5 43.643,11.5 ; P1.2 42.143,10 43.643,11.5 ; P2.3 45.433,17.097 45.433,13.29 43.643,11.5
MODE: P1.7 U1.12 | length 19
  Top Copper Layer w0.25: v1(21.683,21) 22.183,21.5 U1.12
  Bottom Copper Layer w0.25: v1(21.683,21) 21.683,17.76 29.443,10 P1.7
NetC7_1: C7.1 U1.8 | length 4.7
  Top Copper Layer w0.25: U1.8 24.231,25.95 24.458,26.177 24.458,27.675 C7.1
NetC7_2: C7.2 U1.7 | length 4.7
  Top Copper Layer w0.25: C7.2 27.008,27.675 27.008,26.327 27.136,26.2 U1.7
NetU1_2: U1.2 VR2.3 | length 5.8
  Top Copper Layer w0.25: U1.2 28.183,21 28.683,20.5 VR2.3
pcGND: C9.1 C10.1 P3.4 | length 7.8
  Top Copper Layer w0.25: P3.4@10.303,5 11.303,4 C10.1 C9.1
Power_in: C5.2 LM1.3 P1.6 P3.1 P3.2 P4.1 U1.1 U1.9 U1.11 | length 35.5
  Top Copper Layer w0.25: v1(20.183,21.5) 20.683,22 U1.11 ; C5.2 21.683,23 22.683,23 ; v1(22.683,24) 22.683,23 ; U1.9 22.683,23 ; U1.1 27.136,19.048 v1(27.683,18.5)
  Bottom Copper Layer w0.25: v1(20.183,21.5) v1(22.683,24) 22.683,19 23.183,18.5 v1(27.683,18.5) 27.683,14.3 31.983,10
Power_neg: C4.2 P1.5 U1.6 | length 23.4
  Top Copper Layer w0.25: U1.6 28.683,23 ; v1(28.683,24) 28.683,23 ; C4.2 29.683,23 28.683,23
  Bottom Copper Layer w0.25: v1(28.683,24) 34.523,18.16 P1.5
powerVDD: C1.2 LM1.2 P2.2 | length 11.7
  Top Copper Layer w0.25: LM1.2@12.183,31 16.183,35 v1(20.683,35) C1.2

## Polygon pours and split planes (outlines as drawn)
LDO+ on Bottom Copper Layer "Top Layer-Power-LDO+" (solid, pour order 578): 11.683,20 14.183,20 19.183,25 29.183,25 33.683,20.5 44.683,20.5 44.683,28 11.683,28
powerVDD on Bottom Copper Layer "Top Layer-Power-PowerVDD" (solid, pour order 581): 41.183,15.5 46.183,15.5 46.183,37 18.683,37 18.683,28 44.683,28 44.683,18.5 41.183,18.5
Power_in on Bottom Copper Layer "Top Layer-Power-PowerIn" (solid, pour order 583): 19.183,20.25 19.183,25 23.433,25 23.448,24.986 23.448,19.515 23.433,19.5 30.183,19.5 33.183,16.5 33.183,8.5 30.683,8.5 30.683,9.5 22.683,17.5 22.433,17.75 21.933,18.25 21.933,20.25
EPAD on Bottom Copper Layer "Top Layer-Power-PowerGND" (solid, pour order 589): 0,53 47,53 47,0 0,0
Power_in on Top Copper Layer "Top Layer-Power-PowerIn" (solid, pour order 586): -0.317,-20 6.683,-20 6.683,-16 6.683,22.5 23.183,22.5 23.183,25.5 5.496,25.5 5.496,29.857 2.183,29.857 2.183,37 18.425,37 18.425,40.5 -0.317,40.5 -0.317,29.5 -0.317,22.5 -0.317,-1.5 -0.317,-3
NetC7_1 on Top Copper Layer "Top Layer-Power-NetC10_1" (solid, pour order 570): 24.683,23.25 23.683,23.25 23.683,28.75 25.433,28.75 25.433,26.75 24.683,26.75
NetC7_2 on Top Copper Layer "Top Layer-Power-NetC10_2" (solid, pour order 572): 26.683,23.25 26.683,26.75 25.933,26.75 25.933,28.75 27.683,28.75 27.683,23.25
LDO+ on Top Copper Layer "Top Layer-Power-LDO+" (solid, pour order 574): 21.183,22.5 20.683,23 6.842,23 6.842,17.5 16.183,17.5 16.183,19.5 17.183,20.5 19.183,20.5 19.183,22
powerVDD on Top Copper Layer "Top Layer-Power-PowerVDD" (solid, pour order 576): 2.333,30 2.333,32 6.183,32 6.183,36 22.183,36 22.183,32.5 18.183,32.5 18.183,25.73 5.683,25.73 5.683,30
LDO- on Top Copper Layer "Top Layer-Power-LDO-" (solid, pour order 580): 29.683,22.5 31.183,22.5 34.183,19.5 35.683,19.5 35.683,20 36.183,20.5 36.183,22 38.683,22 38.683,18 44.683,18 44.683,21 41.683,21 41.683,25 31.683,25 31.683,23.172 30.355,23.172
EPAD on Top Copper Layer "Top Layer-Power-GND" (solid, pour order 585): 2.346,32.5 2.346,36.5 5.683,36.5 5.683,32.5
EPAD on Top Copper Layer "Top Layer-Power-PowerGND" (solid, pour order 587): 0,53 47,53 47,0 0,0
powerVDD on Internal Copper Layer 2 "Sig2-Power-VDD1" (solid, pour order 621): 0,53 47,53 47,15.63 0,15.63
EPAD on Internal Copper Layer 1 "Sig2-Power-GND" (solid, pour order 625): 0,53 47,53 47,0 0,0

## Silkscreen, mask and mechanical layers (free items; w line width, h text height)
Top Overlay:
  text "12V IN" at 6.933,51.5 h1 r270
  text "OpenMEA" at 27.654,46.498 h3
  text "Power" at 27.654,43.496 h3
  text "Mar 2023" at 27.654,40.498 h3
  text "VSTIM+" at 40.683,29 h1
  text "VSTIM-" at 40.683,27.5 h1
  text "VDD" at 40.683,26 h1
  text "GND" at 40.683,24.5 h1
  text "." at 27.996,20.26 h1.52
  text "PWR" at 3.183,9.215 h1 r90
  text "PWR" at 5.723,9.215 h1 r90
  text "GND" at 8.263,9.215 h1 r90
  text "cGND" at 10.803,9.215 h1 r90
  text "GND" at 26.403,4.815 h1 r270
  text "MODE" at 28.943,4.815 h1 r270
  text "PIN" at 31.483,4.815 h1 r270
  text "PNEG" at 34.023,4.815 h1 r270
  text "LDO-" at 36.563,4.815 h1 r270
  text "ADJ-" at 39.103,4.815 h1 r270
  text "LDO-" at 41.643,4.815 h1 r270
  text "LDO+" at 44.183,4.815 h1 r270